# Altium PCB Ad_Fpga.PcbDoc (part 6 of 8)
Units mil, origin at the board's own origin, x right, y up, seen from the top; angles counter-clockwise.
Board outline 5995 x 3921.26 mil, 6 copper layers (Top Layer, GND, Mid-Layer 1, Mid-Layer 2, VCC, Bottom Layer); 476 components, 538 nets, 2139 pads, 1047 vias.
Unrouted connection lines stored in the file: 2.
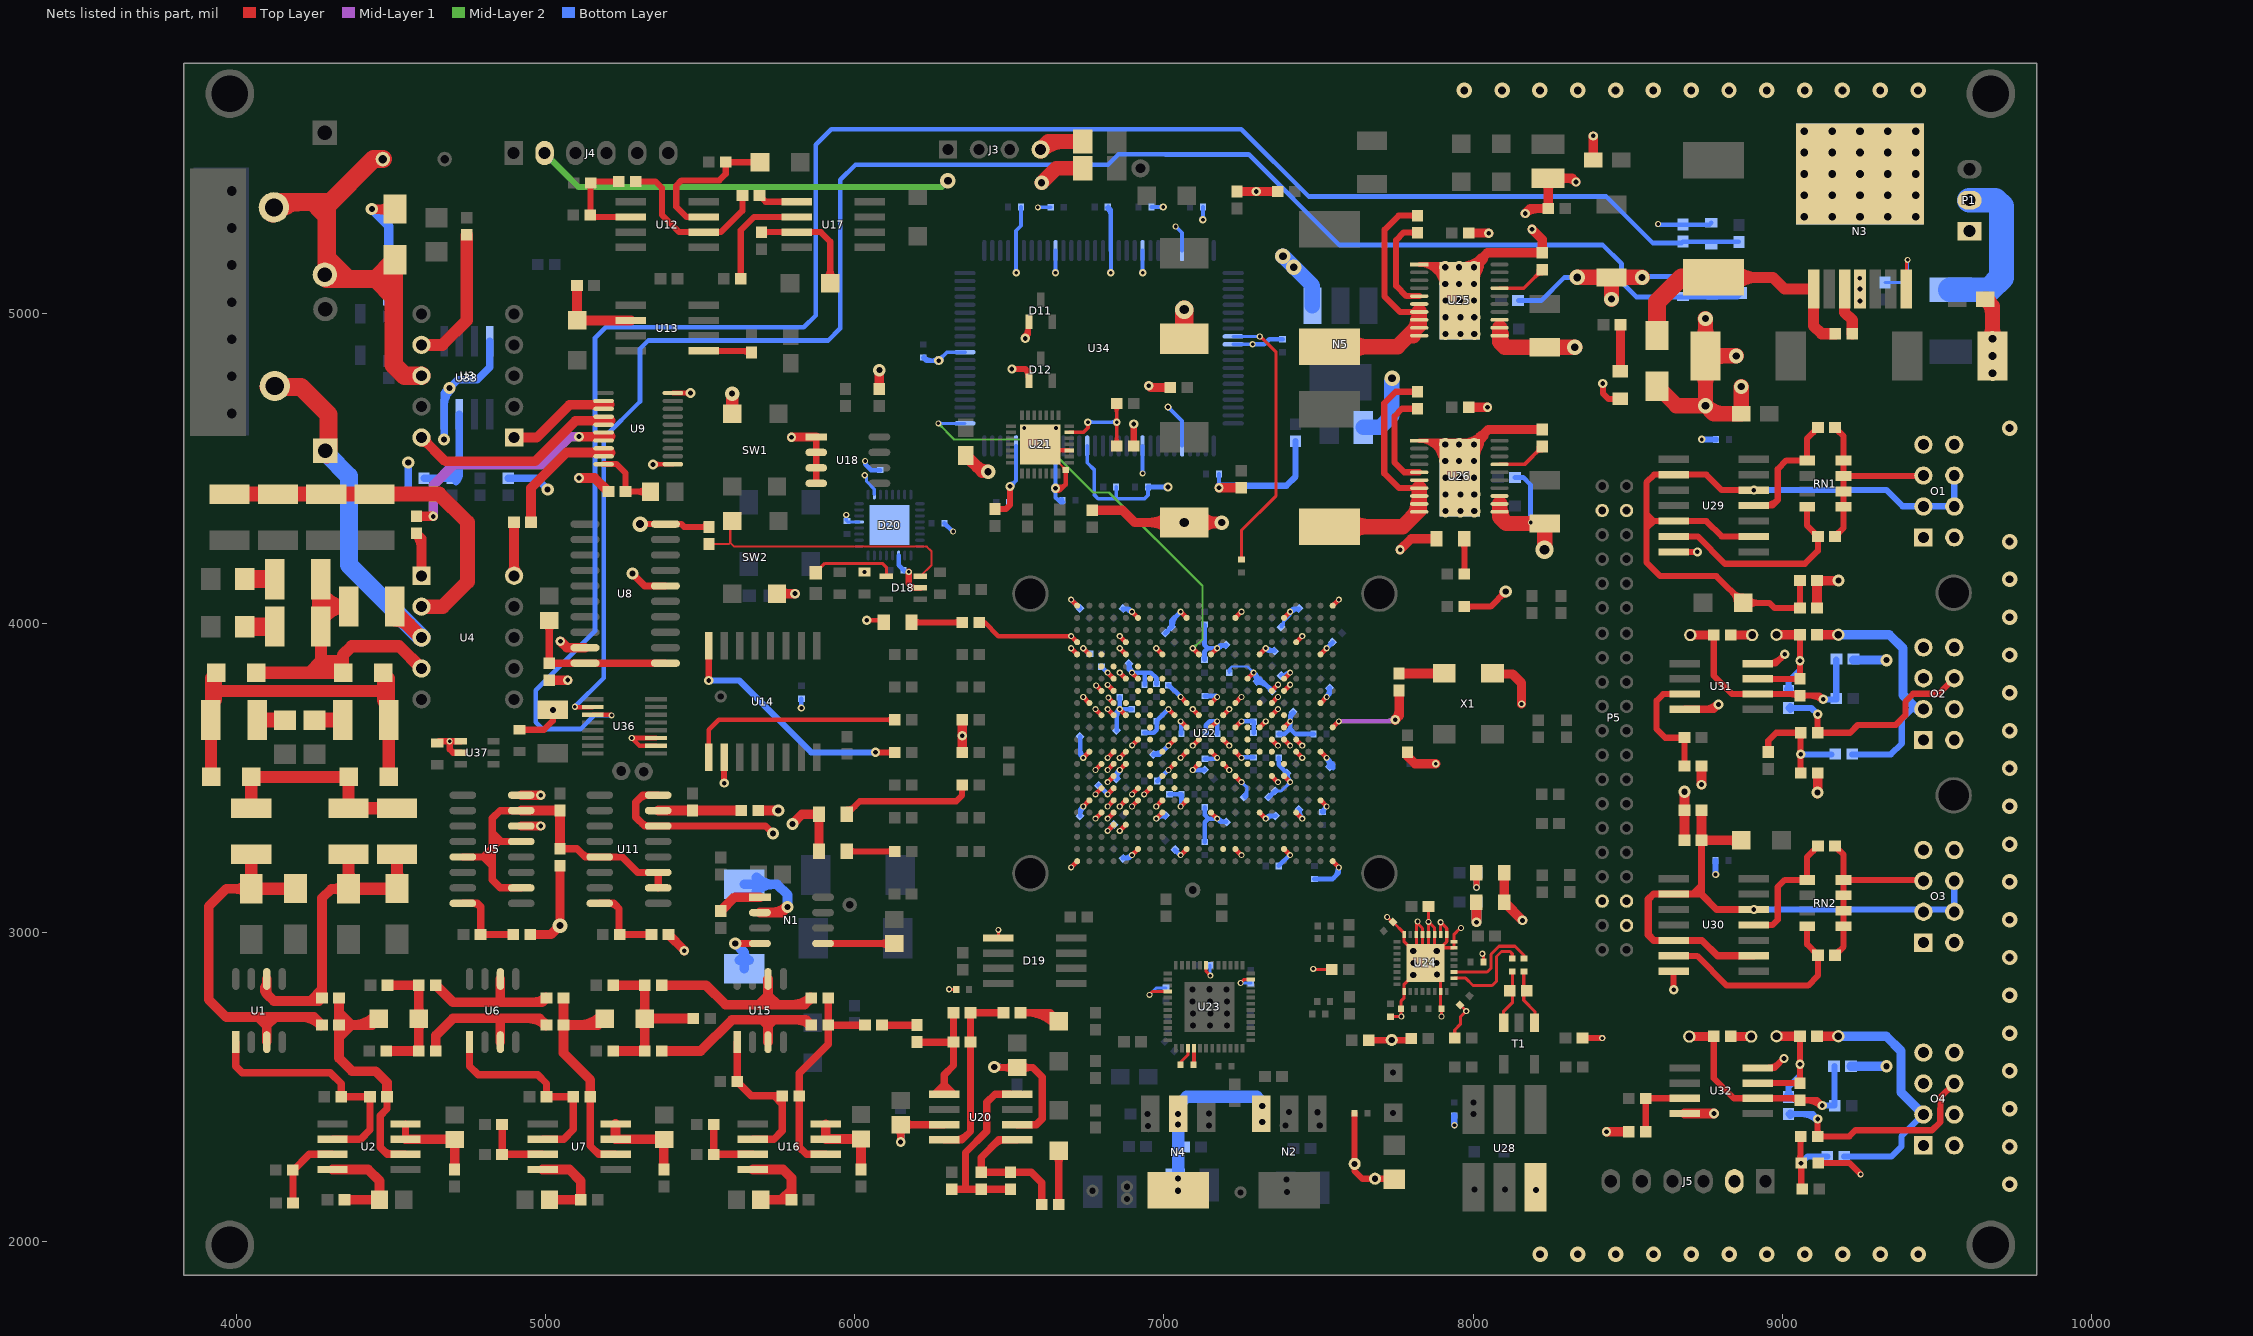
[diagram p10: the nets of this part, all layers, seen from the top]

## Via types
v1: diameter 19.68, hole 11.81, Top Layer to Bottom Layer, 523 vias
v2: diameter 50, hole 25, Top Layer to Bottom Layer, 162 vias
v3: diameter 30, hole 15, Top Layer to Bottom Layer, 100 vias
v4: diameter 39.37, hole 19.68, Top Layer to Bottom Layer, 75 vias
v5: diameter 31.5, hole 15.75, Top Layer to Bottom Layer, 44 vias
v6: diameter 40, hole 20, Top Layer to Bottom Layer, 38 vias
v7: diameter 24, hole 12, Top Layer to Bottom Layer, 33 vias
v8: diameter 47.24, hole 23.62, Top Layer to Bottom Layer, 24 vias
v9: diameter 59.06, hole 31.5, Top Layer to Bottom Layer, 10 vias
v10: diameter 60, hole 30, Top Layer to Bottom Layer, 9 vias
v11: diameter 25.98, hole 12.99, Top Layer to Bottom Layer, tented top, 9 vias
v12: diameter 23.62, hole 11.81, Top Layer to Bottom Layer, 8 vias
v13: diameter 50, hole 27.56, Top Layer to Bottom Layer, 4 vias
v14: diameter 51.18, hole 27.56, Top Layer to Bottom Layer, 2 vias
v15: diameter 39.37, hole 23.62, Top Layer to Bottom Layer, 2 vias
v16: diameter 80, hole 40, Top Layer to Bottom Layer, 1 vias
v17: diameter 47.24, hole 19.68, Top Layer to Bottom Layer, 1 vias
v18: diameter 47.24, hole 27.56, Top Layer to Bottom Layer, 1 vias
v19: diameter 22.05, hole 11.81, Top Layer to Bottom Layer, 1 vias

## Nets (pads, with @x,y where several pads share a name; then routed paths per layer and width w, separated by ;. In a path a pad name is that pad's centre, name@x,y a point inside that pad or via, vN(x,y) a via of type N, cw(c..) or ccw(c..) an arc to the next point about the centre after c; other vN are vias at no path point) (continued)
GND: (continued)
  Bottom Layer w23.62: v4(4555,4519) 4555,4432 4574,4413 C106.2@4606,4413 ; v4(4671,4594) U33.8@4671,4676 4671,4743 4715,4787 4778,4787 4818.64,4827.64 U33.4@4818.64,4912.22 ; U33.8@4671,4699.95 cw(c4748.05,4699.95) v4@4693.57,4754.43 ; v4@4681.95,4741.92 ccw(c4662.47,4753.16) v4@4684.2,4758.98 ; R119.2@4878.32,4468 4970,4468 v4(5006,4432) ; U33.8@4671,4709.45 cw(c4738.55,4709.45) 4690.78,4757.22 ccw(c4738.55,4709.45) U33.8@4671,4709.45 ; 4671,4735.96 cw(c4691.33,4735.96) 4688.54,4756.1 ccw(c4691.33,4735.96) 4671,4735.96 ; 4677.2,4733.68 ccw(c4649.49,4749.68) 4680.39,4757.96 cw(c4649.49,4749.68) 4677.2,4733.68
  Bottom Layer w30: R129.2@9223,2566 v6(9338,2566) ; R126.2@9231,3880 v6(9338,3880)
  Bottom Layer w50: v2(7385,5187) 7480.45,5091.55 N5.1@7480.45,5026.29 ; C229.2@7645.12,4633 7699,4633 7737,4671 v2@7737,4780
  other v1: 6031,4165
  other v2: 8216.89,1957.6 8339.24,1957.6 8461.58,1957.6 8583.93,1957.6 8706.27,1957.6 8828.62,1957.6 8950.97,1957.6 9073.31,1957.6 9195.66,1957.6 9318.01,1957.6 9440.35,1957.6 9736,2183.69 9736,2306.04 9736,2428.39 9736,2550.73 9736,2673.08 9736,2795.43 9736,2917.77 9736,3040.12 9736,3162.46 9736,3284.81 9736,3407.16 9736,3529.5 9736,3651.85 9736,3774.2 9736,3896.54 9736,4018.89 9736,4141.24 9736,4263.58 9736,4630.62 7738,4792 9681,4808 9680.59,4920 7420,5151 9072,5314.48 9162,5314.48 9252,5314.48 9342,5314.48 9432,5314.48 9072,5383.65 9162,5383.65 9252,5383.65 9342,5383.65 9432,5383.65 9072,5452.83 9162,5452.83 9252,5452.83 9342,5452.83 9432,5452.83 9072,5522 9162,5522 9252,5522 9342,5522 9432,5522 9072,5591.17 9162,5591.17 9252,5591.17 9342,5591.17 9432,5591.17 7971.74,5723 8094.09,5723 8216.43,5723 8338.78,5723 8461.12,5723 8583.47,5723 8705.82,5723 8828.16,5723 8950.51,5723 9072.86,5723 9195.2,5723 9317.55,5723 9439.9,5723
  other v3: 9252,5042 9252,5080.78 9251,5116
  other v4: 4688,4760
  other v6: 7911,4362 7959,4362 8004,4362 7911,4416 7959,4416 8004,4416 7911,4470 7957,4470 8003,4470 7910,4524 7955,4524 8003,4524 7910,4578 7955,4578 8003,4578 7911,4935 7959,4935 8004,4935 7911,4989 7959,4989 8004,4989 7911,5043 7957,5043 8003,5043 7910,5097 7955,5097 8003,5097 7910,5151 7955,5151 8003,5151
  other v7: 6548,4631 6651,4631
JDQ1A: R26.2 U9.18 U9.19 | length 416
  Top Layer w31.5: R26.2@4952,4326 4952,4437 5067,4552 5208,4552 5209,4551
JDQ1B: R20.1 U9.16 U9.17 | length 794.4
  Top Layer w31.5: R20.1@4581,4345 v5(4636,4345) ; v5(5107,4603) 5208,4603 5209,4604
  Mid-Layer 1 w31.5: v5(4636,4345) 4636,4446 4702,4512 4988,4512 5079,4603 v5(5107,4603)
JDQ2A: U3.10 U9.14 U9.15 | length 750.2
  Top Layer w31.5: U3.10@4597.64,4586.22 cw(c4597.64,4552.95) 4621.16,4576.48 cw(c4644.68,4600) U3.10@4611.42,4600 ; U3.10@4597.64,4600 4674.64,4523 4965,4523 5096,4654 5208,4654 5209,4655
JDQ2B: U3.1 U9.12 U9.13 | length 405.9
  Top Layer w31.5: U3.1@4897.64,4600 4971,4600 5077,4706 5118,4706 5206,4706 5207,4707 ; U3.1@4907.38,4590.26 cw(c4930.9,4566.73) 4930.9,4600 cw(c4930.9,4633.27) U3.1@4907.38,4609.74
LBO#: U22.M5 U34.31 | length 1547.9
  Top Layer w15: v1(7093.24,3918.21) U22.M5@7112.93,3898.52
  Mid-Layer 2 w7: v1(6270,4646) 6322,4594 6599.23,4594 6651,4542.23 ; 6651.03,4542.23 6771.26,4422 6822.46,4422 7125,4119.46 7125,3948 7095.21,3918.21 v1(7093.24,3918.21) ; v1@7092.62,3918.4 cw(c7104.45,3914.72) 7101.25,3926.69 ; 6280.83,4635.17 cw(c6291.65,4646) 6276.34,4646 ccw(c6291.65,4646) 6280.83,4635.17 ; 6280.83,4635.17 ccw(c6270,4624.35) 6270,4639.66 cw(c6270,4624.35) 6280.83,4635.17 ; v1@7093.24,3924.55 ccw(c7093.24,3944.6) 7107.42,3930.42 cw(c7093.24,3944.6) v1@7093.24,3924.55 ; v1@7099.59,3918.21 cw(c7110.16,3918.21) 7102.68,3925.68 ccw(c7110.16,3918.21) v1@7099.59,3918.21
  Bottom Layer w10: v1(6270,4646) 6270.11,4645.89 U34.31@6355.94,4645.89 ; v1@6273.42,4642.58 cw(c6281.42,4634.58) 6281.42,4645.89 ccw(c6281.42,4634.58) v1@6273.42,4642.58 ; v1@6273.42,4649.42 ccw(c6281.96,4657.96) 6281.96,4645.89 cw(c6281.96,4657.96) v1@6273.42,4649.42
LX75NC1: U22.W18 | length 27.8
  Top Layer w15: v1(6817.65,3367.02) U22.W18@6837.34,3386.71
LX75NC2: U22.Y18 | length 27.8
  Top Layer w15: v1(6778.28,3367.02) U22.Y18@6797.97,3386.71
LX75NC3: U22.Y16 | length 27.8
  Top Layer w15: v1(6778.28,3445.76) U22.Y16@6797.97,3465.45
LX75NC4: U22.W15 | length 27.8
  Top Layer w15: v1(6817.65,3485.13) U22.W15@6837.34,3504.82
LX75NC5: U22.V13 | length 27.8
  Top Layer w15: v1(6857.02,3563.87) U22.V13@6876.71,3583.56
LX75NC6: U22.W13 | length 27.8
  Top Layer w15: v1(6817.65,3563.87) U22.W13@6837.34,3583.56
LX75NC7: U22.W14 | length 27.8
  Top Layer w15: v1(6817.65,3524.5) U22.W14@6837.34,3544.19
LX75NC8: U22.Y14 | length 27.8
  Top Layer w15: v1(6778.28,3524.5) U22.Y14@6797.97,3544.19
LX75NC9: U22.T12
LX75NC10: U22.U12 | length 28.3
  Top Layer w15: v1(6897,3604) 6904.85,3611.85 ; 6905.85,3612.85 6904.85,3611.85 ; U22.U12@6916.08,3622.93 6905,3611.85 6904.85,3611.85
LX75NC11: U22.T14
LX75NC12: U22.R13
LX75NC13: U22.R11
LX75NC14: U22.T11
LX75NC15: U22.W10 | length 27.8
  Top Layer w15: v1(6817.65,3721.36) U22.W10@6837.34,3701.67
LX75NC16: U22.Y10 | length 27.8
  Top Layer w15: v1(6778.28,3721.36) U22.Y10@6797.97,3701.67
LX75NC17: U22.W8 | length 27.6
  Top Layer w15: v1@6818,3800 v1(6818,3799.75) U22.W8@6837.34,3780.41
LX75NC18: U22.V7 | length 27.8
  Top Layer w15: v1(6857.02,3839.47) U22.V7@6876.71,3819.78
LX75NC19: U22.W9 | length 24.5
  Top Layer w15: v1(6820,3758.38) U22.W9@6837.34,3741.04
LX75NC20: U22.Y8 | length 24.9
  Top Layer w15: v1(6780.38,3798) U22.Y8@6797.97,3780.41
LX75NC21: U22.U9
LX75NC22: U22.V9
LX75NC23: U22.T8
LX75NC24: U22.U8
LX75NC25: U22.T10
LX75NC26: U22.U10
LX75NC27: U22.W6
LX75NC28: U22.Y6
LX75NC29: U22.Y5
LX75NC30: U22.AB5 | length 27.8
  Top Layer w15: v1(6699.54,3918.21) U22.AB5@6719.23,3898.52
LX75NC31: U22.R9
LX75NC32: U22.R8
LX75NC33: U22.T7
LX75NC34: U22.R7
LX75NC35: U22.U6
LX75NC36: U22.V5 | length 27.8
  Top Layer w15: v1(6857.02,3918.21) U22.V5@6876.71,3898.52
LX75NC37: U22.T16 | length 27.8
  Top Layer w15: v1(6935.76,3445.76) U22.T16@6955.45,3465.45
LX75NC38: U22.T15
LX75NC39: U22.U17 | length 27.8
  Top Layer w15: v1(6896.39,3406.39) U22.U17@6916.08,3426.08
LX75NC40: U22.U16 | length 27.8
  Top Layer w15: v1(6896.39,3445.76) U22.U16@6916.08,3465.45
LX75NC41: U22.V19 | length 27.8
  Top Layer w15: v1(6857.02,3327.65) U22.V19@6876.71,3347.34
LX75NC42: U22.V18
LX75NC43: U22.R16
LX75NC44: U22.R15
LX75NC45: U22.V17 | length 27.8
  Top Layer w15: v1(6857.02,3406.39) U22.V17@6876.71,3426.08
LX75NC46: U22.W17 | length 27.8
  Top Layer w15: v1(6817.65,3406.39) U22.W17@6837.34,3426.08
MCLKIN: R24.2 U22.A11 | length 373.7
  Top Layer w15: U22.A11@7546,3662.3 v1(7565.69,3681.99)
  Top Layer w31.5: v3(7748,3687) 7761,3700 R24.2@7761,3782 ; v3@7748.53,3686.47 ccw(c7718.42,3716.58) 7761,3716.58
  Mid-Layer 1 w15: v1(7565.69,3681.99) 7742.99,3681.99 v3(7748,3687) ; 7717.79,3681.99 ccw(c7717.79,3717.21) v3@7742.7,3692.3
NC1: U22.E8 | length 27.8
  Top Layer w15: U22.E8@7388.52,3780.41 v1(7408.21,3800.1)
NC2: U22.F8 | length 27.8
  Top Layer w15: U22.F8@7349.15,3780.41 v1(7368.84,3800.1)
NC3: U22.G8
NC4: U22.F9 | length 27.8
  Top Layer w15: U22.F9@7349.15,3741.04 v1(7368.84,3760.73)
NC5: U22.G9
NC6: U22.H10
NC7: U22.E10
NC8: U22.F10 | length 27.8
  Top Layer w15: U22.F10@7349.15,3701.67 v1(7368.84,3721.36)
NC9: U22.G11 | length 27.8
  Top Layer w15: U22.G11@7309.78,3662.3 v1(7329.47,3681.99)
NC10: U22.H11
NC11: U22.E12 | length 27.8
  Top Layer w15: U22.E12@7388.52,3622.93 v1(7408.21,3603.24)
NC12: U22.D12 | length 27.8
  Top Layer w15: U22.D12@7427.89,3622.93 v1(7447.58,3603.24)
NC13: U22.H12
NC14: U22.F12 | length 27.8
  Top Layer w15: U22.F12@7349.15,3622.93 v1(7368.84,3603.24)
NC15: U22.F13
NC16: U22.D13 | length 27.8
  Top Layer w15: U22.D13@7427.89,3583.56 v1(7447.58,3563.87)
NC17: U22.H13
NC18: U22.G13
NC19: U22.E14
NC20: U22.F15 | length 27.8
  Top Layer w15: U22.F15@7349.15,3504.82 v1(7368.84,3485.13)
NC21: U22.F14
NC22: U22.H14
NC23: U22.P16
NC24: U22.P15
NC25: U22.R17 | length 27.8
  Top Layer w15: v1(6975.13,3406.39) U22.R17@6994.82,3426.08
NC26: U22.K21
NetC1_1: C1.1 R8.2 | length 96.5
  Top Layer w59.06: C1.1@4026,4142 R8.2@4122.53,4142
NetC2_1: C2.1 R9.2 | length 96.8
  Top Layer w59.06: C2.1@4026.12,3988 4122.61,3988 R9.2@4122.8,3988.19
NetC5_1: C5.1 R5.1 U2.3 | length 254.6
  Top Layer w23.62: C5.1@4182,2123 4182,2228 4234.79,2280.79 U2.3@4309.78,2280.79
NetC6_1: C6.1 R1.1 | length 90
  Top Layer w47.24: R1.1@4066,3686 4066.12,3686.12 C6.1@4156,3686.12
NetC7_1: C7.1 R18.2 | length 90.4
  Top Layer w47.24: C7.1@4252,3686.12 4342.28,3686.12 R18.2@4342.39,3686
NetC8_1: C8.1 C12.2 U1.1 U2.2 | length 818.8
  Top Layer w23.62: U1.1@3997,2644 3997,2566 4018,2545 4303,2545 4338,2510 C8.1@4338,2467 C12.2@4431,2467 4431,2360 4401,2330 U2.2@4309.78,2330
NetC9_1: C9.1 L6.2 U2.4 | length 430.4
  Top Layer w31.5: U2.4@4309.78,2231.57 4425.43,2231.57 4461.63,2195.37 L6.2@4461.63,2134 C9.1@4349,2134 ; L6.2@4453.28,2125.65 ccw(c4433.12,2105.49) 4433.12,2134 ccw(c4433.12,2162.51) L6.2@4453.28,2142.35 ; L6.2@4453.28,2144.32 ccw(c4433.12,2164.48) 4461.63,2164.48 ccw(c4490.14,2164.48) L6.2@4469.98,2144.32
NetC10_1: C10.1 C11.1 L5.2 R21.2 R22.2 | length 527.1
  Top Layer w31.5: C11.1@4484,2615 R22.2@4589,2615 L5.2@4589,2720 R21.2@4589,2828 C10.1@4488,2828 ; L5.2@4578.92,2709.92 cw(c4554.59,2685.59) 4589,2685.59 cw(c4623.41,2685.59) L5.2@4599.08,2709.92 ; L5.2@4578.92,2730.08 ccw(c4554.59,2754.41) 4589,2754.41 ccw(c4623.41,2754.41) L5.2@4599.08,2730.08
NetC12_1: C12.1 L5.1 R12.1 R15.1 U2.6 | length 1070.2
  Top Layer w23.62: 4472.09,2295.91 ccw(c4508.6,2332.42) U2.6@4508.6,2280.79 ; C12.1@4486,2467 4486,2428 4464,2406 4464,2304 4487.21,2280.79 U2.6@4546,2280.79
  Top Layer w31.5: 4331,2743 4331,2739 ; R12.1@4331,2787 4331,2739 ; 4373.89,2699 ccw(c4373.89,2805.11) L5.1@4448.92,2730.08 ; L5.1@4459,2720 4438,2699 4371,2699 ; C12.1@4486,2467 4486,2513 4449,2550 4373,2550 4331,2592 4331,2659 ; 4331,2659 R15.1@4331,2699 ; 4331,2659 4371,2699 ; R15.1@4331,2699 4331,2739 ; R15.1@4331,2699 4371,2699 ; 4331,2739 4371,2699
NetC13_2: C13.2 D4.1 J1.1 Q1.2 U3.8 | length 1900.7
  Top Layer w59.06: J1.1@4102.36,5338.58 4125.98,5362.2 4246.13,5362.2 ; J1.1@4113.72,5354.66 ccw(c4140.78,5392.96) J1.1@4164.23,5352.35 ; 4362,5113.19 4359.15,5113.19 ; C13.2@4472.72,5501.13 4442.46,5501.13 4291.34,5350 ; D4.1@4511.81,5175.57 4508,5171.76 D4.1@4508,5170.76 ; U3.8@4597.64,4800 4543,4800 4508,4835 4508,5055.62 ; 4246.13,5362.2 4274.84,5333.5 ; 4246.13,5362.2 4291.34,5362.2 4291.34,5350 ; 4274.84,5333.5 4291.34,5317 ; 4274.84,5333.5 4291.34,5350 ; 4291.34,5181 4291.34,5317 ; 4291.34,5181 4291.34,5113.19 4359.15,5113.19 ; 4291.34,5181 4359.15,5113.19 ; 4291.34,5317 4291.34,5350 ; 4359.15,5113.19 4450.43,5113.19 ; 4450.43,5113.19 D4.1@4508,5170.76 ; 4450.43,5113.19 4508,5055.62 ; 4508,5055.62 D4.1@4508,5170.76 ; J1.1@4116.28,5324.66 cw(c4206.91,5234.03) 4206.91,5362.2 ccw(c4206.91,5234.03) J1.1@4116.28,5324.66
NetC15_1: C15.1 L7.2 U2.7 U2.8 | length 395.6
  Top Layer w23.62: U2.7@4546,2330 U2.8@4546,2379.21
  Top Layer w31.5: U2.7@4546,2330 4546.37,2329.63 L7.2@4705,2329.63 C15.1@4705,2232 ; L7.2@4694.68,2321.28 ccw(c4674.52,2301.12) 4674.52,2329.63 ccw(c4674.52,2358.14) L7.2@4694.68,2337.98 ; L7.2@4696.65,2321.28 cw(c4676.49,2301.12) 4705,2301.12 cw(c4733.51,2301.12) L7.2@4713.35,2321.28
NetC16_1: C16.1 R27.2 U7.3 | length 226.2
  Top Layer w23.62: R27.2@4858.79,2376.21 4858.79,2280.79 U7.3@4989.54,2280.79
NetC18_2: C18.2 R23.2 U5.16 | length 286.5
  Top Layer w23.62: U5.16@4731.51,3093 4778,3093 4789,3082 R23.2@4789,2992 C18.2@4895,2992 ; U5.16@4763.01,3093 cw(c4763.01,3056.81) 4788.6,3082.4
NetC19_2: C19.2 L11.2 U13.2 | length 394.9
  Top Layer w31.5: L11.2@5090.92,4990.08 ccw(c5066.59,5014.41) 5101,5014.41 ccw(c5135.41,5014.41) 5111.08,4990.08 ccw(c5138.05,5017.05) 5138.05,4978.91 ; C19.2@5101,5092 L11.2@5101,4980 5102.09,4978.91 U13.2@5275.4,4978.91 ; L11.2@5111.08,4969.92 cw(c5132.76,4948.24) 5132.76,4978.91
NetC20_1: C20.1 L10.1 U8.1 U8.20 | length 574.3
  Top Layer w23.62: L10.1@4999.86,3997.49 cw(c4972.98,3970.61) 5011,3970.61 cw(c5049.02,3970.61) L10.1@5022.14,3997.49 ; L10.1@5011,4008.63 C20.1@5011,3870 U8.20@5127.08,3870 U8.1@5386.92,3870
NetC21_1: C21.1 C24.2 U6.1 U7.2 | length 698.5
  Top Layer w23.62: U6.1@4753,2644 4753,2566 4781,2538 4974,2538 5002,2510 C21.1@5002,2467 C24.2@5089,2467 5089,2361 5058,2330 U7.2@4989.54,2330
NetC22_1: C22.1 L13.1 U9.20 | length 352.8
  Top Layer w19.68: U9.20@5186.8,4513.84 5229.16,4513.84 5258,4485 C22.1@5258,4425 L13.1@5338.63,4425 ; C22.1@5252.23,4430.77 ccw(c5238.31,4444.69) 5258,4444.69 ccw(c5277.69,4444.69) C22.1@5263.77,4430.77 ; C22.1@5264.77,4419.23 cw(c5278.69,4405.31) 5278.69,4425 cw(c5278.69,4444.69) C22.1@5264.77,4430.77 ; L13.1@5326.1,4412.47 ccw(c5295.86,4382.23) 5295.86,4425 ccw(c5295.86,4467.77) L13.1@5326.1,4437.53
NetC23_1: C23.1 R28.2 U5.2 U5.5 U5.7 U5.13 U11.2 U11.3 U11.13 | length 1429.2
  Top Layer w23.62: U5.13@4731.51,3243 4798,3243 ; 4827,3326 4827,3322 ; U5.2@4920.49,3143 4853,3143 4827,3169 4827,3214 ; U5.5@4920.49,3293 4856,3293 ; U5.7@4920.49,3393 4852,3393 4827,3368 4827,3322 ; C23.1@5046,3270 5101,3270 5128,3243 U11.13@5174.51,3243 5247,3243 5297,3193 U11.3@5363.49,3193 U11.2@5363.49,3143 ; 5117.38,3253.62 ccw(c5143.02,3279.25) U11.13@5143.02,3243 ; 4798,3243 4827,3214 ; 4798,3243 4827,3243 ; 4798,3243 4827,3272 ; 4827,3214 4827,3243 ; 4827,3243 4827,3272 ; 4827,3272 4827,3293 ; 4827,3272 4848,3293 ; 4827,3293 4848,3293 ; 4827,3293 4827,3322 ; 4827,3322 4856,3293 ; 4848,3293 4856,3293
  Top Layer w31.5: U5.7@4920.49,3393 R28.2@5046,3393 C23.1@5046,3270
NetC24_1: C24.1 L12.1 R29.1 R30.1 U7.6 | length 865.6
  Top Layer w23.62: C24.1@5144,2467 5144,2308 5171.21,2280.79 U7.6@5225.76,2280.79 ; 5159.09,2292.91 ccw(c5188.35,2322.17) U7.6@5188.35,2280.79
  Top Layer w31.5: R29.1@5057,2787 R30.1@5057,2699 ; 5104.89,2699 ccw(c5104.89,2805.11) L12.1@5179.92,2730.08 ; C24.1@5144,2467 5144,2522 5057,2609 R30.1@5057,2699 ; L12.1@5190,2720 5169,2699 R30.1@5057,2699
NetC25_1: C25.1 L9.2 U7.4 | length 346
  Top Layer w31.5: U7.4@4989.54,2231.57 5076.43,2231.57 5113,2195 C25.1@5113,2134 L9.2@5011.37,2134 ; L9.2@5019.72,2125.65 cw(c5039.88,2105.49) 5039.88,2134 cw(c5039.88,2162.51) L9.2@5019.72,2142.35
NetC26_1: C26.1 C27.1 L12.2 R35.2 R36.2 R39.2 | length 736.1
  Top Layer w31.5: C27.1@5218,2615 R36.2@5320,2615 L12.2@5320,2720 ; C26.1@5218,2828 R35.2@5320,2828 L12.2@5320,2720 ; L12.2@5309.92,2709.92 cw(c5285.59,2685.59) 5320,2685.59 cw(c5354.41,2685.59) 5330.08,2709.92 cw(c5354.41,2685.59) 5354.41,2720 cw(c5354.41,2754.41) 5330.08,2730.08 cw(c5354.41,2754.41) 5320,2754.41 cw(c5285.59,2754.41) L12.2@5309.92,2730.08 ; R39.2@5477,2720 L12.2@5320,2720
NetC28_2: C28.2 R33.2 U11.16 | length 299.6
  Top Layer w23.62: U11.16@5174.51,3093 5220,3093 5236.5,3076.5 5236.5,2994.5 R33.2@5239,2992 C28.2@5342,2992 ; U11.16@5206.01,3093 cw(c5206.01,3059.22) 5229.89,3083.11 ; 5236.5,3010.55 ccw(c5256.55,3010.55) R33.2@5242.38,2996.38
NetC30_1: C30.1 C38.2 U15.1 U16.2 | length 551.1
  Top Layer w23.62: U15.1@5619,2644 C30.1@5619,2516 5665,2470 5738,2470 ; U16.2@5669.29,2330 5738,2330 5765,2357 5765,2443 ; 5738,2470 C38.2@5765,2470 5765,2443 ; 5738,2470 5765,2443
NetC31_1: C31.1 L14.2 U7.7 U7.8 | length 374.4
  Top Layer w31.5: U7.8@5225.76,2379.21 U7.7@5225.76,2330 5226.13,2329.63 L14.2@5383,2329.63 5382,2328.63 C31.1@5382,2232 ; L14.2@5372.68,2337.98 cw(c5352.52,2358.14) 5352.52,2329.63 cw(c5352.52,2301.12) 5372.68,2321.28 cw(c5350.18,2298.78) 5382,2298.78
NetC33_1: C33.1 R40.2 U16.3 | length 223.2
  Top Layer w23.62: R40.2@5543.19,2376.82 C33.1@5543.19,2280 5543.98,2280.79 U16.3@5669.29,2280.79
NetC34_2: C34.2 L17.2 U12.7 | length 496.1
  Top Layer w20: U12.7@5511.62,5313.91 5455.09,5313.91 5422,5347 5422,5415 5439,5432 5561,5432 5582,5453 C34.2@5582,5491 L17.2@5693,5491
NetC35_1: C35.1 R38.2 U11.7 | length 268.5
  Top Layer w31.5: U11.7@5363.49,3393 R38.2@5475,3393 C35.1@5632,3393
NetC36_1: C36.1 L18.1 U17.3 | length 476
  Top Layer w20: C36.1@5697,5265 C36.1@5697.31,5264.69 U17.3@5811.4,5264.69 5889.31,5264.69 5920,5234 L18.1@5920,5100 ; C36.1@5702.96,5259.04 cw(c5716.62,5245.38) 5716.62,5264.69 cw(c5716.62,5284.01) C36.1@5702.96,5270.35 ; L18.1@5905.86,5114.14 ccw(c5871.72,5148.28) 5920,5148.28 ccw(c5968.28,5148.28) L18.1@5934.14,5114.14
NetC38_1: C38.1 R45.1 R46.1 R53.2 U16.6 | length 736.1
  Top Layer w23.62: U16.6@5905.51,2280.79 5843.21,2280.79 5820,2304 C38.1@5820,2470 5820,2543 5914,2637 R46.1@5914,2699 ; R45.1@5914,2787 R46.1@5914,2699 ; R53.2@6033,2699 R46.1@5914,2699
NetC39_1: C39.1 L15.2 U16.4 | length 401.8
  Top Layer w31.5: U16.4@5669.29,2231.57 5767.43,2231.57 5795,2204 5795,2166 ; L15.2@5695.37,2134 5763,2134 ; L15.2@5703.72,2125.65 cw(c5723.88,2105.49) 5723.88,2134 cw(c5723.88,2162.51) L15.2@5703.72,2142.35 ; 5795,2171 5795,2166 ; 5763,2134 C39.1@5795,2134 5795,2166 ; 5763,2134 5795,2166
NetC41_2: C41.2 D18.3 SW2.2 | length 901.5
  Top Layer w7: C41.2@5528,4256 5593,4256 5597,4260 ; SW2.2@5603,4330 5597,4324 5597,4260 ; D18.3@6211.9,4151.15 6248,4187.25 6248,4232 6233,4247 5610,4247 5597,4260
NetC42_1: C42.1 L19.2 U16.7 U16.8 | length 350
  Top Layer w31.5: U16.8@5906.14,2378.58 5906.14,2330.63 L19.2@6020,2330.63 C42.1@6020,2232 ; L19.2@6009.68,2322.28 ccw(c5989.52,2302.12) 5989.52,2330.63 ccw(c5989.52,2359.14) L19.2@6009.68,2338.98 ; L19.2@6011.65,2322.28 cw(c5991.49,2302.12) 6020,2302.12 cw(c6048.51,2302.12) L19.2@6028.35,2322.28
NetC45_1: C45.1 R63.1 R74.2 U20.4 | length 625.9
  Top Layer w23.62: U20.4@6289,2327.79 6346.79,2327.79 6374,2355 R63.1@6374,2644 C45.1@6374,2739 R74.2@6481,2739 ; U20.4@6326.4,2327.79 ccw(c6326.4,2377) 6361.2,2342.2
NetC45_2: C45.2 R58.1 R63.2 U20.1 | length 481.3
  Top Layer w23.62: R58.1@6201,2644 R63.2@6319,2644 ; U20.1@6258.14,2475.86 6289,2506.71 ; U20.1@6289,2475.43 6289,2506.71 ; C45.2@6319,2739 R63.2@6319,2644 ; U20.1@6319.86,2475.86 6289,2506.71 ; 6289,2506.71 6289,2538 6319,2568 R63.2@6319,2644
NetC47_1: C47.1 R64.1 R72.2 U20.8 | length 609.4
  Top Layer w23.62: R64.1@6313.33,2168 6358,2168 ; C47.1@6504,2168 R72.2@6408.67,2168 6358,2168 ; U20.8@6525.22,2475.43 6453.43,2475.43 6427,2449 6427,2356 6358,2287 6358,2168
NetC47_2: C47.2 R72.1 R75.2 U20.5 | length 511.1
  Top Layer w23.62: 6450.21,2312.21 cw(c6487.82,2274.6) U20.5@6487.82,2327.79 ; U20.5@6525.22,2327.79 6465.79,2327.79 6408.67,2270.67 R72.1@6408.67,2223 C47.2@6504,2223 6571,2223 6605,2189 R75.2@6605,2118
NetC49_1: C49.1 R79.2 U21.6 | length 632.6
  Top Layer w12: U21.6@6694,4617.43 6739.43,4617.43 6754,4632 v7(6754,4650) ; C49.1@6838.51,4581.49 ccw(c6818.03,4601.97) 6847,4601.97 ccw(c6875.97,4601.97) C49.1@6855.49,4581.49 ; R79.2@6838.51,4701.51 cw(c6818.03,4681.03) 6847,4681.03 cw(c6875.97,4681.03) R79.2@6855.49,4701.51 ; C49.1@6847,4573 v7(6847,4650) R79.2@6847,4710 ; 6754,4635.51 cw(c6768.49,4635.51) 6758.24,4645.76 ccw(c6768.49,4635.51) 6754,4635.51 ; 6754,4635.51 ccw(c6739.51,4635.51) 6749.76,4645.76 cw(c6739.51,4635.51) 6754,4635.51 ; 6847,4635.51 cw(c6861.49,4635.51) 6851.24,4645.76 ccw(c6861.49,4635.51) 6847,4635.51 ; 6847,4635.51 ccw(c6832.51,4635.51) 6842.76,4645.76 cw(c6832.51,4635.51) 6847,4635.51 ; 6847,4664.49 cw(c6832.51,4664.49) 6842.76,4654.24 ccw(c6832.51,4664.49) 6847,4664.49 ; 6847,4664.49 ccw(c6861.49,4664.49) 6851.24,4654.24 cw(c6861.49,4664.49) 6847,4664.49
  Bottom Layer w12: v7(6754,4650) v7(6847,4650) ; 6768.49,4650 cw(c6768.49,4664.49) 6758.24,4654.24 ccw(c6768.49,4664.49) 6768.49,4650 ; 6768.49,4650 ccw(c6768.49,4635.51) 6758.24,4645.76 cw(c6768.49,4635.51) 6768.49,4650 ; 6832.51,4650 cw(c6832.51,4635.51) 6842.76,4645.76 ccw(c6832.51,4635.51) 6832.51,4650 ; 6832.51,4650 ccw(c6832.51,4664.49) 6842.76,4654.24 cw(c6832.51,4664.49) 6832.51,4650
NetC55_1: C55.1 U23.28 | length 53.8
  Top Layer w12: C55.1@7095.3,2571.02 7097.21,2572.93 U23.28@7097.21,2624
NetC55_2: C55.2 U23.27 | length 63
  Top Layer w10: C55.2@7053.3,2571.02 7053.3,2578.3 7077.51,2602.51 U23.27@7077.51,2624
NetC64_2: C64.2 U34.89 | length 928
  Top Layer w10: C64.2@7247.48,4209.23 ccw(c7238.95,4217.77) 7251.02,4217.77 ccw(c7263.09,4217.77) C64.2@7254.55,4209.23 ; C64.2@7251.02,4205.7 7251.02,4300.02 7363,4412 7363,4876 v1@7310,4929 ; v1@7310,4922.16 cw(c7310,4905.64) 7321.68,4917.32
  Bottom Layer w10: U34.89@7224.06,4927.39 7309.61,4927.39 v1(7310,4927) ; 7297.38,4927.39 cw(c7297.38,4914.38) v1@7306.58,4923.58 ; 7299.24,4927.39 ccw(c7299.24,4937.76) v1@7306.58,4930.42
NetC70_1: C70.1 L27.2 U25.6 U25.7 U25.8 U25.9 U25.10 | length 1064.5
  Top Layer w20: C70.1@7814.34,5312.34 ccw(c7800.69,5298.69) 7800.69,5318 ccw(c7800.69,5337.31) C70.1@7814.34,5323.66 ; C70.1@7820,5318 7759,5318 7714,5273 7714,5056 7763.54,5006.46 U25.7@7826,5006.46
  Top Layer w50: L27.2@7536,4894 7756,4894 7826,4964 U25.8@7826,4980.87 U25.7@7826,5006.46 ; L27.2@7599.45,4869.92 cw(c7657.59,4811.78) 7657.59,4894 cw(c7657.59,4976.22) L27.2@7599.45,4918.08 ; 7806.35,4944.35 ccw(c7769.82,4980.87) U25.8@7821.47,4980.87 ; U25.10@7806.91,4929.68 cw(c7843.65,4929.68) U25.9@7817.67,4955.67
NetC70_2: C70.2 U25.5 | length 346.1
  Top Layer w20: C70.2@7814.34,5257.34 ccw(c7800.69,5243.69) 7800.69,5263 ccw(c7800.69,5282.31) C70.2@7814.34,5268.66 ; C70.2@7820,5263 7775,5263 7751,5239 7751,5091 7784.36,5057.64 U25.5@7826,5057.64
NetC71_1: C71.1 L28.2 U26.6 U26.7 U26.8 U26.9 U26.10 | length 1071.9
  Top Layer w20: C71.1@7814.34,4742.34 ccw(c7800.69,4728.69) 7800.69,4748 ccw(c7800.69,4767.31) C71.1@7814.34,4753.66 ; C71.1@7820,4748 7750,4748 7713,4711 7713,4484 7760.54,4436.46 U26.7@7826,4436.46
  Top Layer w50: L28.2@7536,4312 7773,4312 7826,4365 U26.9@7826,4385.28 U26.8@7826,4410.87 U26.7@7826,4436.46 ; L28.2@7599.45,4287.92 cw(c7657.59,4229.78) 7657.59,4312 cw(c7657.59,4394.22) L28.2@7599.45,4336.08 ; 7803.93,4342.93 ccw(c7761.59,4385.28) U26.9@7821.47,4385.28
NetC71_2: C71.2 U26.5 | length 357.3
  Top Layer w20: C71.2@7814.34,4687.34 ccw(c7800.69,4673.69) 7800.69,4693 ccw(c7800.69,4712.31) C71.2@7814.34,4698.66 ; C71.2@7820,4693 7770,4693 7746,4669 7746,4519 7777.36,4487.64 U26.5@7826,4487.64
NetC72_1: C72.1 U24.3 | length 310.8
  Top Layer w10: U24.3@7937.84,2870.64 8045.64,2870.64 8058,2883 8058,2928 8084,2954 8135.98,2954 8164.98,2925 C72.1@8164.98,2914.3
NetC72_2: C72.2 R100.1 T1.3 | length 181.5
  Top Layer w10: C72.2@8161.98,2872.3 8164,2870.28 8164,2779 8200,2743 8200,2708 T1.3@8199,2707
NetC73_1: C73.1 U24.2 | length 310.1
  Top Layer w10: U24.2@7937.84,2850.94 7976.06,2850.94 8000,2827 8062,2827 8076,2841 8076,2921 8092,2937 8120,2937 8126.98,2930.02 C73.1@8126.98,2914.3
NetC73_2: C73.2 R100.2 T1.1 | length 178.6
  Top Layer w10: T1.1@8099,2707 8099,2744 8128,2773 8128,2869.28 C73.2@8124.98,2872.3
NetC78_1: C78.1 U25.17 | length 208.4
  Top Layer w12: U25.17@8085.84,5083.23 8164.23,5083.23 C78.1@8224,5143 ; 8201.81,5120.81 cw(c8224,5098.62) C78.1@8224,5130 ; 8204.22,5123.22 ccw(c8185.44,5142) C78.1@8212,5142
NetC80_1: C80.1 U26.17 | length 207.6
  Top Layer w12: U26.17@8085.84,4513.23 8166.23,4513.23 C80.1@8224,4571 ; 8201.81,4548.81 cw(c8224,4526.62) C80.1@8224,4558 ; 8204.22,4551.22 ccw(c8185.44,4570) C80.1@8212,4570
NetC85_1: C85.1 R107.1 U32.7 | length 324.4
  Top Layer w20: C85.1@8553.34,2359.66 ccw(c8539.46,2373.54) 8559.09,2373.54 ; R107.1@8553.34,2456.34 cw(c8539.46,2442.46) 8559.09,2442.46 ; C85.1@8559,2354 8559.09,2354.09 8559.09,2462.09 U32.7@8684.38,2462.09 ; 8559.09,2373.08 ccw(c8578.08,2373.08) C85.1@8564.66,2359.66 ; 8559.09,2442.92 cw(c8578.08,2442.92) R107.1@8564.66,2456.34 ; R107.1@8565.66,2456.34 cw(c8579.54,2442.46) 8579.54,2462.09 ; R107.1@8565.66,2467.66 ccw(c8579.08,2481.08) 8579.08,2462.09
NetC86_1: C86.1 pad.1@8703,3961 R111.1 R126.1 R127.2 U31.2 | length 890.4
  Top Layer w20: C86.1@8773.34,3955.34 cw(c8759.69,3941.69) 8779,3941.69 cw(c8798.31,3941.69) C86.1@8784.66,3955.34 ; C86.1@8779,3961 8779,3830 8838.91,3770.09 U31.2@8920.6,3770.09 9052.91,3770.09 R111.1@9058,3765 9121,3765 v3(9133,3753) ; 9028.8,3770.09 cw(c9028.8,3736.8) R111.1@9052.34,3760.34 ; R111.1@9063.66,3759.34 cw(c9077.31,3745.69) 9077.31,3765 cw(c9077.31,3784.31) R111.1@9063.66,3770.66 ; 9091.96,3765 cw(c9091.96,3711.96) v3@9129.46,3749.46
  Top Layer w30: pad.1@8703,3961 C86.1@8779,3961
  Bottom Layer w20: v3(9133,3753) R127.2@9175,3753 ; R127.2@9175,3754 R126.1@9175,3881
NetC87_1: C87.1 C90.2 L34.2 O3.2 O3.6 O3.7 U30.2 U30.5 U30.9 U30.12 | length 2164.4
  Top Layer w20: U30.9@8908.84,2923 U30.9@8939.84,2923 ; v3(8908.84,3073) U30.12@8939.84,3073
  Top Layer w23.62: 8739,3154 8739,3150 ; C87.1@8739,3297 8739,3150 ; U30.9@8908.84,2923 8791,2923 8741,2973 U30.5@8649,2973 8585,2973 8567,2991 8567,3106 8584,3123 U30.2@8649,3123 8712,3123 ; v3(8908.84,3073) 8788,3073 8738,3123 ; 8712,3123 8738,3123 ; 8712,3123 8739,3150 ; 8738,3123 8739,3124 8739,3150
  Top Layer w31.5: C90.2@8739,3394 C87.1@8739,3297 L34.2@8868,3297 ; L34.2@8857.92,3286.92 ccw(c8833.59,3262.59) 8833.59,3297 ccw(c8833.59,3331.41) L34.2@8857.92,3307.08
  Bottom Layer w20: v3(8908.84,3073) 9549.67,3073 O3.7@9557,3065.67 O3.6@9557,3165.67
NetC89_1: C89.1 R108.1 U31.7 | length 475.7
  Top Layer w20: R108.1@8677.34,3623.34 ccw(c8663.69,3609.69) 8663.69,3629 ccw(c8663.69,3648.31) R108.1@8677.34,3634.66 ; C89.1@8678.34,3542.66 ccw(c8664.69,3556.31) 8684,3556.31 ccw(c8703.31,3556.31) C89.1@8689.66,3542.66 ; R108.1@8678.34,3623.34 cw(c8664.69,3609.69) 8684,3609.69 cw(c8703.31,3609.69) R108.1@8689.66,3623.34 ; C89.1@8684,3537 R108.1@8684,3629 8622,3629 8594,3657 8594,3749 8615.09,3770.09 U31.7@8684.38,3770.09
NetC92_1: C92.1 pad.3 R113.1 R129.1 R130.2 U32.2 | length 913
  Top Layer w20: C92.1@8773.34,2657.34 cw(c8759.69,2643.69) 8779,2643.69 cw(c8798.31,2643.69) C92.1@8784.66,2657.34 ; C92.1@8779,2662 8779,2527 8843.91,2462.09 U32.2@8920.6,2462.09 9051.91,2462.09 R113.1@9058,2456 9113,2456 v3(9130,2439) ; 9026.39,2462.09 cw(c9026.39,2425.39) R113.1@9052.34,2451.34 ; R113.1@9063.66,2450.34 cw(c9077.31,2436.69) 9077.31,2456 cw(c9077.31,2475.31) R113.1@9063.66,2461.66 ; 9076.89,2456 cw(c9076.89,2385.89) v3@9126.46,2435.46
  Top Layer w30: pad.3@8700,2662 C92.1@8779,2662
  Bottom Layer w20: v3(9130,2439) 9170,2439 R129.1@9170,2566
NetC93_1: C93.1 R109.2 R114.1 R131.1 | length 274.7
  Top Layer w20: R114.1@9054.34,2333.34 cw(c9040.69,2319.69) 9060,2319.69 cw(c9079.31,2319.69) R114.1@9065.66,2333.34 ; 9060,2274 9059,2274 9060,2275 R114.1@9060,2339 ; C93.1@9062,2253 9062,2172 R109.2@9065,2169
  Bottom Layer w20: v3@9062,2253 9083,2274 R131.1@9146,2274
  other v3: 9061,2252
NetC94_1: C94.1 C95.1 O1.3 RN1.5 RN1.6 RN1.7 RN1.8 | length 667.7
  Top Layer w20: C95.1@9171,4280 9199,4308 RN1.5@9199,4376 RN1.7@9199,4476 ; C94.1@9171,4632 9199,4604 RN1.8@9199,4526 RN1.7@9199,4476 ; C95.1@9180,4280 cw(c9201.73,4280) C95.1@9186.36,4295.36 ; C94.1@9180,4632 ccw(c9201.73,4632) C94.1@9186.36,4616.64 ; O1.3@9457,4477 9456,4476 RN1.7@9199,4476
NetC94_2: C94.2 RN1.1 U29.11 | length 472.8
  Top Layer w20: U29.11@8908.84,4380 8968,4380 8986,4398 ; U29.11@8946.27,4381.81 ccw(c8946.91,4437.09) 8986,4398 ; C94.2@9100.64,4616.64 ccw(c9085.27,4632) C94.2@9107,4632 ; C94.2@9116,4632 9081,4597 RN1.1@9081,4526 9014,4526 8986,4498 8986,4398
NetC95_2: C95.2 RN1.4 U29.6 | length 724.7
  Top Layer w20: U29.6@8649,4280 8727,4280 8815,4192 9074,4192 9116,4234 C95.2@9116,4280 9081,4315 RN1.4@9081,4376 ; C95.2@9100.64,4295.36 cw(c9085.27,4280) C95.2@9107,4280 ; C95.2@9110.34,4274.34 cw(c9096.69,4260.69) 9116,4260.69 cw(c9135.31,4260.69) C95.2@9121.66,4274.34
NetC96_1: C96.1 C97.2 L33.2 O1.2 O1.6 O1.7 U29.2 U29.5 U29.9 U29.12 | length 2739
  Top Layer w20: 8561,4360 8561,4354 ; L33.2@8854,4065 ccw(c8805.72,4065) 8839.86,4099.14 ccw(c8874,4133.28) L33.2@8874,4085 ; L33.2@8888.14,4050.86 cw(c8922.28,4016.72) 8922.28,4065 cw(c8922.28,4113.28) L33.2@8888.14,4079.14 ; U29.9@8908.84,4280 8805,4280 8755,4330 U29.5@8649,4330 8585,4330 ; v3(8908.84,4430) 8805,4430 8755,4480 U29.2@8649,4480 8586,4480 8561,4455 8561,4354 ; C96.1@9051.34,4043.34 ccw(c9037.69,4029.69) 9037.69,4049 ccw(c9037.69,4068.31) C96.1@9051.34,4054.66 ; C96.1@9052.34,4054.66 ccw(c9038.69,4068.31) 9058,4068.31 ccw(c9077.31,4068.31) C96.1@9063.66,4054.66 ; C97.2@9052.34,4131.34 cw(c9038.69,4117.69) 9058,4117.69 cw(c9077.31,4117.69) C97.2@9063.66,4131.34 ; C97.2@9058,4137 C96.1@9058,4049 8975,4049 8959,4065 L33.2@8874,4065 8787,4152 8605,4152 8561,4196 8561,4306 ; 8561,4306 8561,4330 ; 8561,4306 8585,4330 ; 8561,4330 8561,4354 ; 8561,4330 8585,4330 ; 8561,4354 8585,4330
  Bottom Layer w20: v3(8908.84,4430) 9338,4430 9390,4378 9556,4378 O1.7@9557,4377 O1.6@9557,4477
NetC98_1: C98.1 pad.1@8982,3962 R111.2 R124.2 U31.3 | length 590.4
  Top Layer w20: U31.3@8920.6,3819.31 9057.31,3819.31 R111.2@9058,3820 v3(9058,3878) C98.1@9058,3962 ; 9037.95,3819.31 cw(c9037.95,3798.95) R111.2@9052.34,3813.34 ; 9039.43,3819.31 ccw(c9039.43,3837.57) R111.2@9052.34,3824.66 ; R111.2@9052.34,3826.66 ccw(c9038.69,3840.31) 9058,3840.31 ccw(c9077.31,3840.31) R111.2@9063.66,3826.66 ; C98.1@9052.34,3956.34 cw(c9038.69,3942.69) 9058,3942.69 cw(c9077.31,3942.69) C98.1@9063.66,3956.34
  Top Layer w30: pad.1@8982,3962 C98.1@9058,3962
  Bottom Layer w20: R124.2@9015.34,3786.66 ccw(c9001.69,3800.31) 9021,3800.31 ccw(c9040.31,3800.31) R124.2@9026.66,3786.66 ; R124.2@9021,3780 9021,3811 9058,3848 v3(9058,3878)
NetC98_2: C98.2 O2.2 pad.0@9182,3962 R128.2 | length 839.3
  Top Layer w30: C98.2@9113,3962 pad.0@9182,3962
  Bottom Layer w20: R128.2@9227,3575 9352,3575 9387,3610 9387,3688 9423,3724 9425.67,3721.33
  Bottom Layer w30: pad.0@9182,3962 9347,3962 9391,3918 9391,3767 9436.67,3721.33 O2.2@9457,3721.33
NetC99_1: C99.1 R110.2 R112.1 R128.1 | length 502.1
  Top Layer w20: R110.2@8949.34,3589.66 ccw(c8935.69,3603.31) 8955,3603.31 ccw(c8974.31,3603.31) R110.2@8960.66,3589.66 ; R110.2@8955,3583 8955,3619 8981,3645 R112.1@9060,3645 v3(9060,3575) C99.1@9060,3515 ; R112.1@9053.34,3639.34 ccw(c9039.69,3625.69) 9039.69,3645 ccw(c9039.69,3664.31) R112.1@9053.34,3650.66 ; C99.1@9054.34,3520.66 ccw(c9040.69,3534.31) 9060,3534.31 ccw(c9079.31,3534.31) C99.1@9065.66,3520.66 ; R112.1@9054.34,3639.34 cw(c9040.69,3625.69) 9060,3625.69 cw(c9079.31,3625.69) R112.1@9065.66,3639.34
  Bottom Layer w20: v3(9060,3575) R128.1@9159,3575
NetC100_1: C100.1 C101.1 O3.3 RN2.5 RN2.6 RN2.7 RN2.8 | length 669.7
  Top Layer w20: C101.1@9171,2925 9199,2953 RN2.5@9199,3019 RN2.6@9199,3069 RN2.8@9199,3169 ; C100.1@9171,3278 9199,3250 RN2.8@9199,3169 ; C101.1@9180,2925 cw(c9201.73,2925) C101.1@9186.36,2940.36 ; C100.1@9180,3278 ccw(c9201.73,3278) C100.1@9186.36,3262.64 ; O3.3@9457,3165.67 9453.67,3169 RN2.8@9199,3169
NetC100_2: C100.2 RN2.1 U30.11 | length 435.3
  Top Layer w20: U30.11@8908.84,3023 8969,3023 8986,3040 8986,3146 9009,3169 RN2.1@9081,3169 9081,3243 C100.2@9116,3278 ; C100.2@9100.64,3262.64 ccw(c9085.27,3278) C100.2@9107,3278
NetC101_2: C101.2 RN2.4 U30.6 | length 741.9
  Top Layer w20: U30.6@8649,2923 8725,2923 8821,2827 9084,2827 9116,2859 C101.2@9116,2925 9081,2960 RN2.4@9081,3019 ; C101.2@9100.64,2940.36 cw(c9085.27,2925) C101.2@9107,2925 ; C101.2@9110.34,2919.34 cw(c9096.69,2905.69) 9116,2905.69 cw(c9135.31,2905.69) C101.2@9121.66,2919.34
NetC102_1: C102.1 pad.1@8982,2663 R113.2 R125.2 U32.3 | length 607.8
  Top Layer w20: U32.3@8920.6,2511.31 R113.2@9057.69,2511.31 ; 9037.95,2511.31 cw(c9037.95,2490.95) R113.2@9052.34,2505.34 ; 9039.43,2511.31 ccw(c9039.43,2529.57) R113.2@9052.34,2516.66 ; R113.2@9052.34,2517.66 ccw(c9038.69,2531.31) 9058,2531.31 ccw(c9077.31,2531.31) R113.2@9063.66,2517.66 ; C102.1@9052.34,2657.34 cw(c9038.69,2643.69) 9058,2643.69 cw(c9077.31,2643.69) C102.1@9063.66,2657.34 ; R113.2@9058,2511 v3(9058,2572) C102.1@9058,2663
  Top Layer w30: pad.1@8982,2663 C102.1@9058,2663
  Bottom Layer w20: R125.2@9015.34,2472.66 ccw(c9001.69,2486.31) 9021,2486.31 ccw(c9040.31,2486.31) R125.2@9026.66,2472.66 ; R125.2@9021,2466 9021,2500 9058,2537 v3(9058,2572)
NetC102_2: C102.2 O4.2 pad.0@9182,2663 R131.2 | length 858.4
  Top Layer w30: C102.2@9113,2663 pad.0@9182,2663
  Bottom Layer w20: R131.2@9201,2274 9354,2274 9386,2306 9386,2339 O4.2@9457,2410
  Bottom Layer w30: pad.0@9182,2663 9337,2663 9385,2615 9385,2482 O4.2@9457,2410
NetC103_1: C103.1 D6.2 L32.1 N3.1 | length 1019.4
  Top Layer w36: L32.1@8778,5118 8971,5118 9008.22,5080.78 N3.1@9102,5080.78 9102,4961 9127,4936 C103.1@9172,4936 ; L32.1@8846.4,5088.97 cw(c8916.49,5018.88) 8916.49,5118 cw(c8916.49,5217.12) L32.1@8846.4,5147.03
  Top Layer w59.06: D6.2@8595,4930 8595,5038 8675,5118 L32.1@8778,5118
NetC103_2: C103.2 N3.3 | length 155.1
  Top Layer w36: N3.3@9202,5080.78 9202,5005 9227,4980 C103.2@9227,4936
NetC106_1: C106.1 R117.1 U33.7 | length 412.9
  Bottom Layer w23.62: C106.1@4606,4468 R117.1@4696.77,4468 4720.21,4491.44 U33.7@4720.21,4676 ; R117.1@4692.4,4473.38 ccw(c4625.24,4540.53) 4720.21,4540.53 ; R117.1@4709.1,4456.67 ccw(c4682.27,4483.5) 4720.21,4483.5
NetC107_1: C107.1 N1.2 | length 465.8
  Top Layer w31.5: N1.2@5692.75,3063 5764,3063 v4(5782,3081) ; 5729.04,3063 ccw(c5729.04,3133.96) v4@5779.22,3083.78
  Bottom Layer w31.5: C107.1@5642,3154.62 5748.38,3154.62 5782,3121 v4(5782,3081) ; C107.1@5681.99,3132.35 cw(c5735.75,3078.58) 5735.75,3154.62 cw(c5735.75,3230.66) C107.1@5681.99,3176.89
NetC107_2: C107.2 N1.4 | length 235.6
  Top Layer w23.62: v4(5613,2963) N1.4@5692.75,2963
  Bottom Layer w31.5: v4(5613,2963) 5642,2934 ; C107.2@5626.94,2908.66 ccw(c5613.16,2934) 5642,2934 ; C107.2@5642,2881 5642,2934 ; C107.2@5657.06,2908.66 cw(c5670.84,2934) 5642,2934
NetC112_2: C112.2 L21.2 U20.3 | length 370.2
  Top Layer w23.62: L21.2@6136.86,2365.49 cw(c6109.98,2338.61) 6148,2338.61 cw(c6186.02,2338.61) L21.2@6159.14,2365.49 ; v5(6148,2321) L21.2@6148,2376.63 6148.37,2377 U20.3@6289,2377 ; L21.2@6161.1,2365.49 cw(c6188.88,2337.72) 6188.88,2377 ; L21.2@6161.1,2387.77 ccw(c6187.09,2413.76) 6187.09,2377
  Bottom Layer w23.62: v5(6148,2321) C112.2@6148,2375
NetC116_1: C116.1 L23.1 U20.6 | length 622
  Top Layer w23.62: v4(6451,2563) 6452.37,2561.63 L23.1@6525,2561.63 6575.37,2561.63 6606,2531 6606,2396 6587,2377 U20.6@6525.22,2377 ; v4@6456.57,2568.57 ccw(c6473.32,2585.32) 6473.32,2561.63 ; L23.1@6511.9,2550.49 ccw(c6485.01,2523.61) 6485.01,2561.63 ccw(c6485.01,2599.65) L23.1@6511.9,2572.77 ; L23.1@6538.1,2550.49 cw(c6564.99,2523.61) 6564.99,2561.63 cw(c6564.99,2599.65) L23.1@6538.1,2572.77
  Bottom Layer w23.62: v4(6451,2563) 6452,2562 C116.1@6525,2562 ; v4@6456.57,2568.57 ccw(c6472.42,2584.42) 6472.42,2562
NetC212_1: C212.1 R31.2 R37.1 U12.2 | length 331.4
  Top Layer w20: R37.1@5236,5429 5150,5429 C212.1@5145,5424 5145,5321 R31.2@5144,5320 5150.09,5313.91 U12.2@5275.4,5313.91
NetC213_1: C213.1 C214.1 N2.3 N4.2 N4.4 pad.0@7046,2163 pad.0@7046,2203 pad.0@7046,2377 pad.0@7046,2411 pad.0@7318,2385 pad.0@7318,2437 | length 616.2
  Bottom Layer w39.37: C213.1@7035.88,2182 7046,2192.12 pad.0@7046,2411 7046,2439 7074,2467 7300,2467 7318,2449 7318,2420 pad.0@7318,2385
NetC217_1: C217.1 U17.1 | length 128.6
  Top Layer w20: C217.1@5691,5383 5710.88,5363.12 U17.1@5811.4,5363.12
NetC217_2: C217.2 R37.2 U12.6 | length 541.7
  Top Layer w20: R37.2@5291,5429 5354,5429 5376,5407 5376,5320 5431.31,5264.69 U12.6@5511.62,5264.69 5566.69,5264.69 5636,5334 C217.2@5636,5383
NetC218_2: C218.2 R139.1 R141.2 U36.2 | length 5639.3
  Top Layer w15: v1@5095,3728 U36.2@5152,3728
  Bottom Layer w15: v1(5094,3729) 5187,3822 5187,4599 5304.76,4716.76 5304.76,4886.76 5332,4914 5914,4914 5953,4953 5953,5434 6002,5483 6819,5483 6853,5517 7003,5517 ; 7004,5516 7274,5516 7567,5223 8419.5,5223 8480.5,5162 8480.5,5102.5 8528,5055 8856,5055 R139.1@8869,5068
NetC219_2: C219.2 R140.1 R142.2 U36.3 | length 6115.6
  Top Layer w15: U36.3@5152,3703 5211,3703 v1(5213,3701)
  Bottom Layer w15: v1(5213,3701) 5157,3701 5113,3657 4990,3657 4968,3679 4968,3782 5159,3973 5159,4922 5194,4957 5835,4957 5873,4995 5873,5547 5924,5598 7250,5598 7468,5380 8431.5,5380 8582,5229.5 8674.5,5229.5 R142.2@8679,5234 8680,5233 R140.1@8860,5233
NetD1_1: D1.1 D2.2 R4.1 R15.2 U1.3 | length 1629.7
  Top Layer w31.5: D1.1@4031.97,3124.97 ccw(c3995.67,3088.67) 3995.67,3140 ccw(c3995.67,3191.33) D1.1@4031.97,3155.03 ; D1.1@4047,3140.02 3966,3140 3909,3083 3909,2782 3966,2725 4069,2725 ; U1.3@4097,2644.75 4097,2697 ; 4206.79,2725 cw(c4206.79,2630.79) R15.2@4273.41,2697.41 ; R15.2@4276,2699 4250,2725 4125,2725 ; 4069,2725 4098,2725 ; 4069,2725 4097,2697 ; 4097,2697 4097,2724 4098,2725 ; 4097,2697 4125,2725 ; 4098,2725 4125,2725
  Top Layer w39.37: D1.1@4034.75,3162.74 ccw(c4005.18,3192.31) 4047,3192.31 ccw(c4088.82,3192.31) D1.1@4059.25,3162.74 ; R4.1@4047,3251.2 D1.1@4047,3140.02 D2.2@4190,3140 ; D1.1@4059.25,3127.75 cw(c4088.82,3098.18) 4088.82,3140 cw(c4088.82,3181.82) D1.1@4059.25,3152.25 ; D2.2@4177.75,3127.75 ccw(c4148.18,3098.18) 4148.18,3140 ccw(c4148.18,3181.82) D2.2@4177.75,3152.25
NetD3_1: D3.1 D5.2 R12.2 R14.1 R19.1 U1.6 | length 1587
  Top Layer w31.5: U1.6@4093.06,2824.63 ccw(c4143.02,2824.63) 4107.7,2789.3 ; U1.6@4093.61,2826.63 ccw(c4112.5,2815.51) 4097,2800 ; U1.6@4097,2849 4097,2800 ; 4245.42,2777 ccw(c4245.42,2816.58) R12.2@4273.41,2788.59 ; R12.2@4274.21,2784.89 ccw(c4262.25,2752.75) 4238,2777 ; 4276,2824 4276,2815 ; D3.1@4346.97,3124.97 ccw(c4310.67,3088.67) 4310.67,3140 ccw(c4310.67,3191.33) D3.1@4346.97,3155.03 ; D3.1@4362,3140.02 4306,3140 4276,3110 4276,2815 ; 4097,2800 4120,2777 4238,2777 ; 4238,2777 4266,2777 R12.2@4276,2787 4276,2815 ; 4238,2777 4276,2815
  Top Layer w39.37: D3.1@4349.75,3162.74 ccw(c4320.18,3192.31) 4362,3192.31 ccw(c4403.82,3192.31) D3.1@4374.25,3162.74 ; R14.1@4362,3251.2 D3.1@4362,3140.02 4519,3140 R19.1@4519,3251.2 ; D3.1@4374.25,3127.75 cw(c4403.82,3098.18) 4403.82,3140 cw(c4403.82,3181.82) D3.1@4374.25,3152.25 ; D5.2@4506.75,3127.75 ccw(c4477.18,3098.18) 4477.18,3140 ccw(c4477.18,3181.82) D5.2@4506.75,3152.25 ; D5.2@4506.75,3162.74 ccw(c4477.18,3192.31) 4519,3192.31 ccw(c4560.82,3192.31) D5.2@4531.25,3162.74
NetD4_2: D4.2 R115.1 | length 470.4
  Top Layer w31.5: v4(4437,5339) 4437.42,5338.58 D4.2@4511.81,5338.58 ; D4.2@4496.78,5323.55 ccw(c4460.49,5287.26) 4460.49,5338.58 ccw(c4460.49,5389.91) D4.2@4496.78,5353.62
  Bottom Layer w31.5: v4(4437,5339) 4492,5284 R115.1@4492,5047
NetD8_1: D8.1 R62.1 | length 491
  Top Layer w20: D8.1@5974,3381 6016,3423 6328,3423 6347,3442 R62.1@6347,3476 ; D8.1@5974,3396 ccw(c5974,3432.21) 5999.61,3406.61 ; R62.1@6341.34,3470.34 cw(c6327.69,3456.69) 6347,3456.69 cw(c6366.31,3456.69) R62.1@6352.66,3470.34
NetD9_1: D9.1 R56.2 | length 223.3
  Top Layer w20: D9.1@5974,3261 R56.2@6129,3261 ; D9.1@5981.07,3253.93 cw(c5998.14,3236.86) 5998.14,3261 cw(c5998.14,3285.14) D9.1@5981.07,3268.07 ; R56.2@6122.34,3255.34 ccw(c6108.69,3241.69) 6108.69,3261 ccw(c6108.69,3280.31) R56.2@6122.34,3266.66
NetD10_1: D10.1 R66.2 | length 232.3
  Top Layer w20: D10.1@6183,4002 R66.2@6347,4002 ; D10.1@6190.07,3994.93 cw(c6207.14,3977.86) 6207.14,4002 cw(c6207.14,4026.14) D10.1@6190.07,4009.07 ; R66.2@6340.34,3996.34 ccw(c6326.69,3982.69) 6326.69,4002 ccw(c6326.69,4021.31) R66.2@6340.34,4007.66
NetD13_1: D13.1 R94.2 | length 183.3
  Top Layer w20: D13.1@7964.93,4260.93 cw(c7947.86,4243.86) 7972,4243.86 cw(c7996.14,4243.86) D13.1@7979.07,4260.93 ; R94.2@7966.34,4163.66 ccw(c7952.69,4177.31) 7972,4177.31 ccw(c7991.31,4177.31) R94.2@7977.66,4163.66 ; R94.2@7972,4158 D13.1@7972,4273
NetD14_1: D14.1 R122.2 | length 196.4
  Top Layer w19.68: D14.1@8003.82,3179.82 cw(c7986.48,3162.48) 8011,3162.48 cw(c8035.52,3162.48) D14.1@8018.18,3179.82 ; v12(8011,3144) D14.1@8011,3192
  Bottom Layer w19.68: v12(8011,3144) R122.2@8011,3192 ; 8011,3172.31 ccw(c7991.31,3172.31) 8005.23,3186.23 cw(c7991.31,3172.31) 8011,3172.31 ; 8011,3172.31 cw(c8030.69,3172.31) 8016.77,3186.23 ccw(c8030.69,3172.31) 8011,3172.31
NetD15_1: D15.1 R123.2 | length 130
  Top Layer w31.5: v5(8011,3032) D15.1@8011,3097
  Bottom Layer w31.5: v5(8011,3032) R123.2@8011,3097
NetD16_1: D16.1 R106.1 | length 150
  Top Layer w30: D16.1@8477,4815 R106.1@8477,4965
NetD18_4: D18.4 R157.1 | length 276
  Top Layer w10: R157.1@5873,4162.5 5873,4163 5903,4193 6089,4193 6101.66,4180.34 D18.4@6101.66,4151.15
NetJ2_1: J2.1 Q2.1 R17.1 U4.3 | length 1269.1
  Top Layer w47.24: R17.1@4511.8,4011.66 cw(c4511.8,3946.65) 4557.77,3992.62 ; R17.1@4511.8,4038.59 U4.3@4597.64,3952.76
  Top Layer w59.06: J2.1@4102.36,4763.78 4207.22,4763.78 4297,4674 4297,4551.92 Q2.1@4291.34,4546.26 ; R17.1@4511.8,4038.59 R17.1@4511.8,4053
  Bottom Layer w59.06: Q2.1@4291.34,4546.26 4363,4474.6 4363,4187.39 U4.3@4597.64,3952.76
NetL1_1: L1.1 L2.2 L3.1 L4.2 R1.2 R18.1 | length 1796.3
  Top Layer w31.5: 4488,3780 4492,3776
  Top Layer w39.37: R1.2@3908.85,3728.55 ccw(c3866.13,3780) 3933,3780 ; 3916.39,3777.71 cw(c3989.3,3777.71) L1.1@3939.98,3831.4 ; L2.2@3917,3502 3916.39,3502.61 R1.2@3916.39,3686 R1.2@3916.39,3734 ; L3.1@4466.93,3831.49 cw(c4412.36,3773.48) 4492,3773.48 ; R18.1@4480.84,3723.32 ccw(c4453.7,3732.7) 4474,3753 ; 4488,3780 4474,3780 ; L4.2@4492,3502 R18.1@4492,3686 R18.1@4492,3735 ; R18.1@4493.38,3731.19 cw(c4495.96,3753) 4474,3753 ; R18.1@4499.2,3728.83 cw(c4538.55,3780) 4474,3780 ; R1.2@3916.39,3734 3916.39,3780 ; R1.2@3916.39,3734 3933,3750.61 3933,3780 ; 3916.39,3780 3933,3780 ; 3916.39,3780 3916.39,3822.39 L1.1@3933,3839 3933,3780 ; 3933,3780 4474,3780 ; 4474,3753 4474,3780 ; 4474,3753 R18.1@4492,3735 ; 4474,3780 L3.1@4474,3839 4492,3821 4492,3776 R18.1@4492,3735
NetL1_2: L1.2 L3.2 R8.1 R9.1 R17.2 U4.4 | length 1418.8
  Top Layer w39.37: L1.2@4063,3839 4236,3839 ; R9.1@4272.4,3988.19 4273,3987.59 4273,3877 ; 4272.4,4059 4278.4,4053 R17.2@4362.2,4053 ; R9.1@4281.62,4014.28 cw(c4362.19,3949.83) R17.2@4362.2,4053 ; R8.1@4281.62,4091.72 ccw(c4362.19,4156.17) R17.2@4362.2,4053 ; L3.2@4334.4,3835.21 ccw(c4273,3810.99) 4273,3877 ; U4.4@4597.64,3852.76 4525.39,3925 4372,3925 4344,3897 4344,3874 ; 4236,3839 4273,3839 ; 4236,3839 4236,3840 4273,3877 ; 4273,3839 4273,3877 ; 4273,3839 L3.2@4344,3839 4344,3874 ; 4273,3877 4341,3877 4344,3874
  Top Layer w59.06: R9.1@4272.4,3988.19 4272.4,4059 R8.1@4272.4,4141.73
NetL2_1: L2.1 L4.1 R4.2 R14.2 R19.2 | length 674.4
  Top Layer w39.37: R4.2@4047,3400.8 L2.1@4047,3502 L4.1@4362,3502 R14.2@4362,3400.8 R19.2@4519,3400.8
NetL20_1: L20.1 N1.5 | length 289.9
  Top Layer w23.62: N1.5@5897,2963 6126.63,2963 L20.1@6127,2962.63 ; 6086.12,2963 cw(c6086.12,2923.72) L20.1@6113.9,2951.49 ; 6087.91,2963 ccw(c6087.91,2999.76) L20.1@6113.9,2973.77
NetL24_1: L24.1 R74.1 | length 304.2
  Top Layer w23.62: R74.1@6536,2739 6633,2739 L24.1@6660,2712 ; R74.1@6550.9,2739 cw(c6550.9,2602.9) L24.1@6647.14,2699.14 ; 6607.93,2739 cw(c6607.93,2659.93) L24.1@6663.84,2715.84
NetL25_1: L25.1 R75.1 | length 244
  Top Layer w23.62: L25.1@6647.14,2280.14 cw(c6616.09,2249.09) 6660,2249.09 cw(c6703.91,2249.09) L25.1@6672.86,2280.14 ; R75.1@6660,2118 L25.1@6660,2293
NetN1_1: N1.1 R42.1 | length 145.4
  Top Layer w31.5: R42.1@5566,3068 5611,3113 N1.1@5692.75,3113
NetN3_7: N3.7 R151.1 | length 231.3
  Top Layer w10: N3.7@9402,5080.78 9402,5171 v1(9406,5175)
  Bottom Layer w10: R151.1@9333,5102 9388,5102 9405,5119 9405,5174 v1(9406,5175)
NetO2_6: O2.6 R112.2 R124.1 | length 794.7
  Top Layer w20: R112.2@9109.34,3650.66 ccw(c9095.69,3664.31) 9115,3664.31 ccw(c9134.31,3664.31) R112.2@9120.66,3650.66 ; v3(9115,3705) R112.2@9115,3645 9220,3645 9245,3670 9368,3670 9399,3701 9399,3746 9424,3771 9506.67,3771 O2.6@9557,3821.33 ; R112.2@9121.66,3639.34 cw(c9135.31,3625.69) 9135.31,3645 cw(c9135.31,3664.31) R112.2@9121.66,3650.66
  Bottom Layer w20: R124.1@9021,3725 9095,3725 v3(9115,3705) ; R124.1@9026.66,3719.34 cw(c9040.31,3705.69) 9040.31,3725 cw(c9040.31,3744.31) R124.1@9026.66,3730.66
NetO4_6: O4.6 R114.2 R125.1 | length 859.1
  Top Layer w20: R114.2@9109.34,2344.66 ccw(c9095.69,2358.31) 9115,2358.31 ccw(c9134.31,2358.31) R114.2@9120.66,2344.66 ; v3(9115,2395) R114.2@9115,2339 9217,2339 9237,2359 9485,2359 9511.47,2385.47 9511.47,2429.39 9512,2429.91 9512,2465 O4.6@9557,2510 ; R114.2@9121.66,2333.34 cw(c9135.31,2319.69) 9135.31,2339 cw(c9135.31,2358.31) R114.2@9121.66,2344.66
  Bottom Layer w20: R125.1@9021,2411 9099,2411 v3(9115,2395) ; R125.1@9026.66,2405.34 cw(c9040.31,2391.69) 9040.31,2411 cw(c9040.31,2430.31) R125.1@9026.66,2416.66 ; 9064.3,2411 cw(c9064.3,2344.3) v3@9111.46,2391.46
NetP1_2: P1.2 RT1.1 | length 523.7
  Bottom Layer w80: RT1.1@9545,5078 9670,5078 9710,5118 9710,5348 9689.76,5368.24 P1.2@9606.26,5368.24
NetR3_2: R3.2 R7.2 R13.2 R16.2 U4.2 | length 1192.2
  Top Layer w47.24: R3.2@3976.38,4417.32 R7.2@4132.98,4417.32 R13.2@4289.59,4417.32 4360.02,4417.32 ; 4369,4417.32 4360.02,4417.32 ; U4.2@4597.64,4052.76 4665.76,4052.76 4746.65,4133.65 4746.65,4326.35 4655.68,4417.32 R16.2@4446.19,4417.32 4360.02,4417.32
NetR20_2: R20.2 U4.1 | length 245.3
  Top Layer w31.5: R20.2@4579.41,4287.41 cw(c4535.4,4243.4) 4597.64,4243.4 ; R20.2@4581,4290 4597.64,4273.36 U4.1@4597.64,4152.76 ; U4.1@4587.89,4162.5 ccw(c4564.37,4186.02) 4597.64,4186.02 ccw(c4630.9,4186.02) U4.1@4607.38,4162.5
NetR21_1: R21.1 R29.2 U6.6 | length 503.6
  Top Layer w31.5: R21.1@4644,2828 4699,2773 4827,2773 4988,2773 R29.2@5002,2787 ; 4853,2773 U6.6@4853,2848.25 ; 4961.76,2773 ccw(c4961.76,2826.24) R29.2@4999.41,2788.59
NetR22_1: R22.1 R30.2 U6.3 | length 581.2
  Top Layer w31.5: R22.1@4644,2615 4644,2666 4699,2721 4980,2721 R30.2@5002,2699 ; U6.3@4853,2644 4853,2721 ; 4942.45,2721 cw(c4942.45,2640.45) R30.2@4999.41,2697.41
NetR24_1: R24.1 X1.3 | length 146
  Top Layer w31.5: R24.1@7761,3837 X1.3@7907,3837
NetR26_1: R26.1 U4.10 | length 225.8
  Top Layer w23.62: U4.10@4897,4153.39 U4.10@4897.64,4152.76
  Top Layer w31.5: U4.10@4887.89,4162.5 ccw(c4865.91,4184.48) 4897,4184.48 ; U4.10@4897,4153.39 R26.1@4897,4326 ; 4897,4187.56 ccw(c4932.44,4187.56) U4.10@4907.38,4162.5
NetR32_1: R32.1 U3.7 | length 456
  Top Layer w39.37: U3.7@4597.64,4900 4665,4900 4744.09,4979.09 R32.1@4744.09,5255.91
NetR35_1: R35.1 R45.2 U15.6 | length 756.6
  Top Layer w31.5: R35.1@5375,2828 5518,2828 5581,2765 5689,2765 ; U15.6@5719,2848.25 5719,2795 ; 5755,2765 5749,2765 ; 5799.45,2765 ccw(c5799.45,2845.55) R45.2@5856.41,2788.59 ; R45.2@5859,2787 5837,2765 5749,2765 ; 5689,2765 5719,2765 ; 5689,2765 5719,2795 ; 5719,2765 5749,2765 ; 5719,2765 5719,2795 ; 5719,2795 5749,2765
NetR36_1: R36.1 R46.2 U15.3 | length 687.6
  Top Layer w31.5: R36.1@5375,2615 5501,2615 5602,2716 5701,2716 ; U15.3@5719,2644 5719,2698 ; 5811.52,2716 cw(c5811.52,2652.52) R46.2@5856.41,2697.41 ; R46.2@5859,2699 5842,2716 5737,2716 ; 5701,2716 5737,2716 ; 5701,2716 5719,2698 ; 5719,2698 5737,2716
NetR41_2: R41.2 U17.2 | length 385.5
  Top Layer w20: R41.2@5625.34,5119.66 ccw(c5611.69,5133.31) 5631,5133.31 ccw(c5650.31,5133.31) R41.2@5636.66,5119.66 ; R41.2@5631,5114 5631,5271 5673.91,5313.91 U17.2@5811.4,5313.91
NetR43_2: R43.2 U13.5 | length 182.8
  Top Layer w20: U13.5@5511.62,4880.48 5659.52,4880.48 R43.2@5665,4875 ; 5634.87,4880.48 cw(c5634.87,4845.87) R43.2@5659.34,4870.34
NetR49_1: R49.1 U14.9 | length 743.7
  Top Layer w15: U14.9@5527,3565.76 5527,3654 5560,3687 R49.1@6129,3687 ; R49.1@6120.58,3679.58 ccw(c6102.65,3661.65) 6102.65,3687 ccw(c6102.65,3712.35) R49.1@6120.58,3694.42
NetR50_2: R50.2 U14.8 | length 840.6
  Top Layer w20: v3(5527,3814) U14.8@5527,3926 ; v3(6066.5,3581.5) R50.2@6129,3581.5 ; R50.2@6122.34,3575.84 ccw(c6108.69,3562.19) 6108.69,3581.5 ccw(c6108.69,3600.81) R50.2@6122.34,3587.16
  Bottom Layer w20: v3(5527,3814) 5626,3814 5858.5,3581.5 v3(6066.5,3581.5)
NetR53_1: R53.1 R58.2 | length 113
  Top Layer w23.62: R53.1@6088,2699 R58.2@6201,2699
NetR66_1: R66.1 U22.AB4 | length 343.8
  Top Layer w15: R66.1@6402,4002 6420,4002 6464.42,3957.58 6544.42,3957.58 6554,3957.58 v1(6699.54,3957.58) U22.AB4@6719.23,3937.89